# Altium PCB arduino.PcbDoc
Units mil, origin at the board's own origin, x right, y up, seen from the top; angles counter-clockwise.
Board outline 3149.61 x 3149.61 mil, 2 copper layers (Top Layer, Bottom Layer); 27 components, 42 nets, 155 pads, 33 vias.
Unrouted connection lines stored in the file: 2.
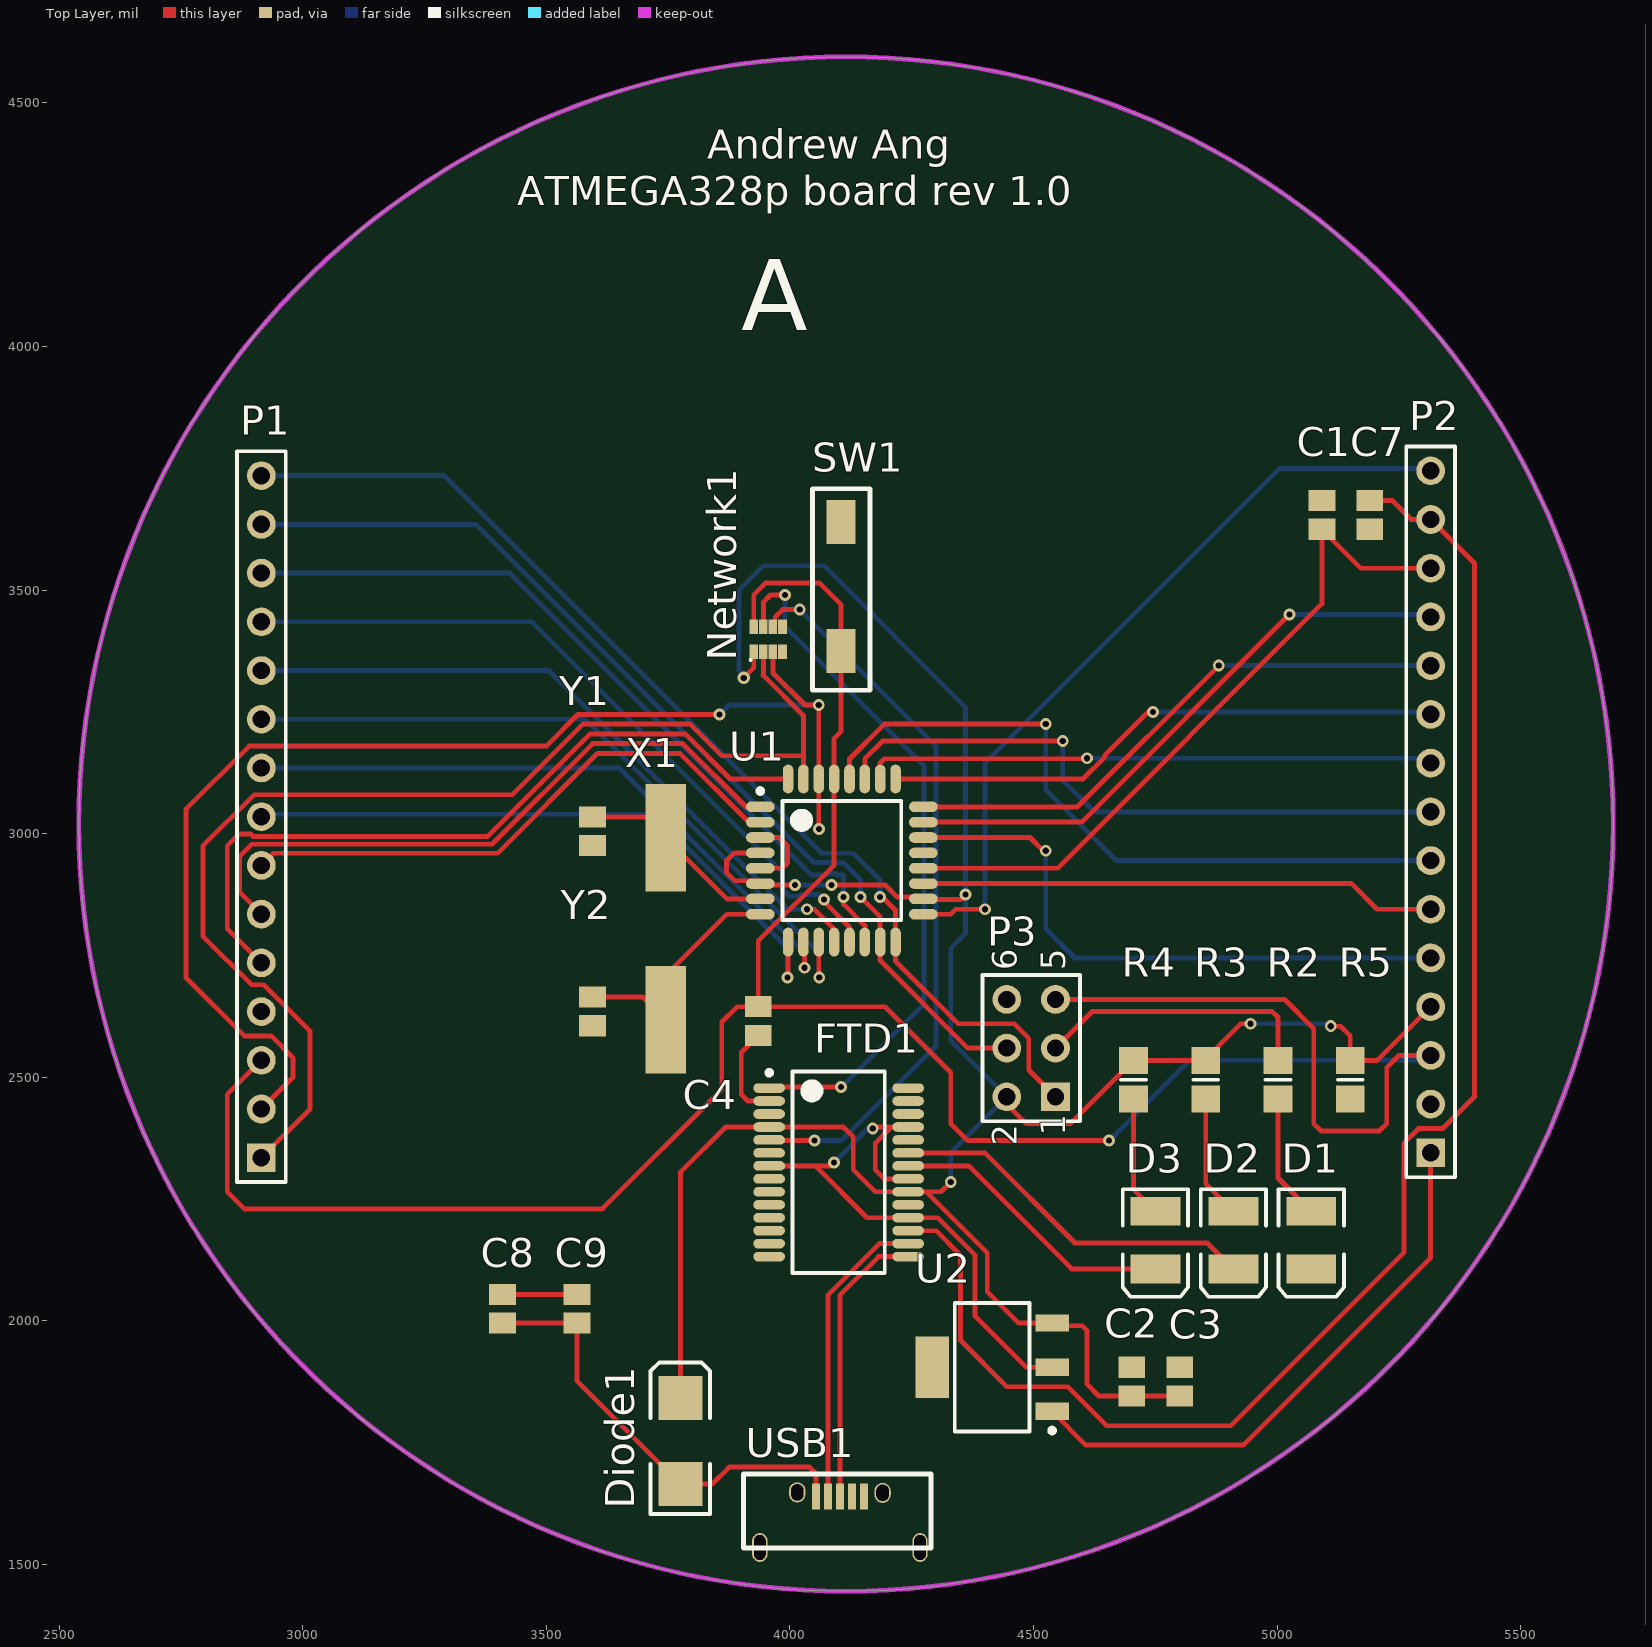
[diagram p0: Top Layer view]
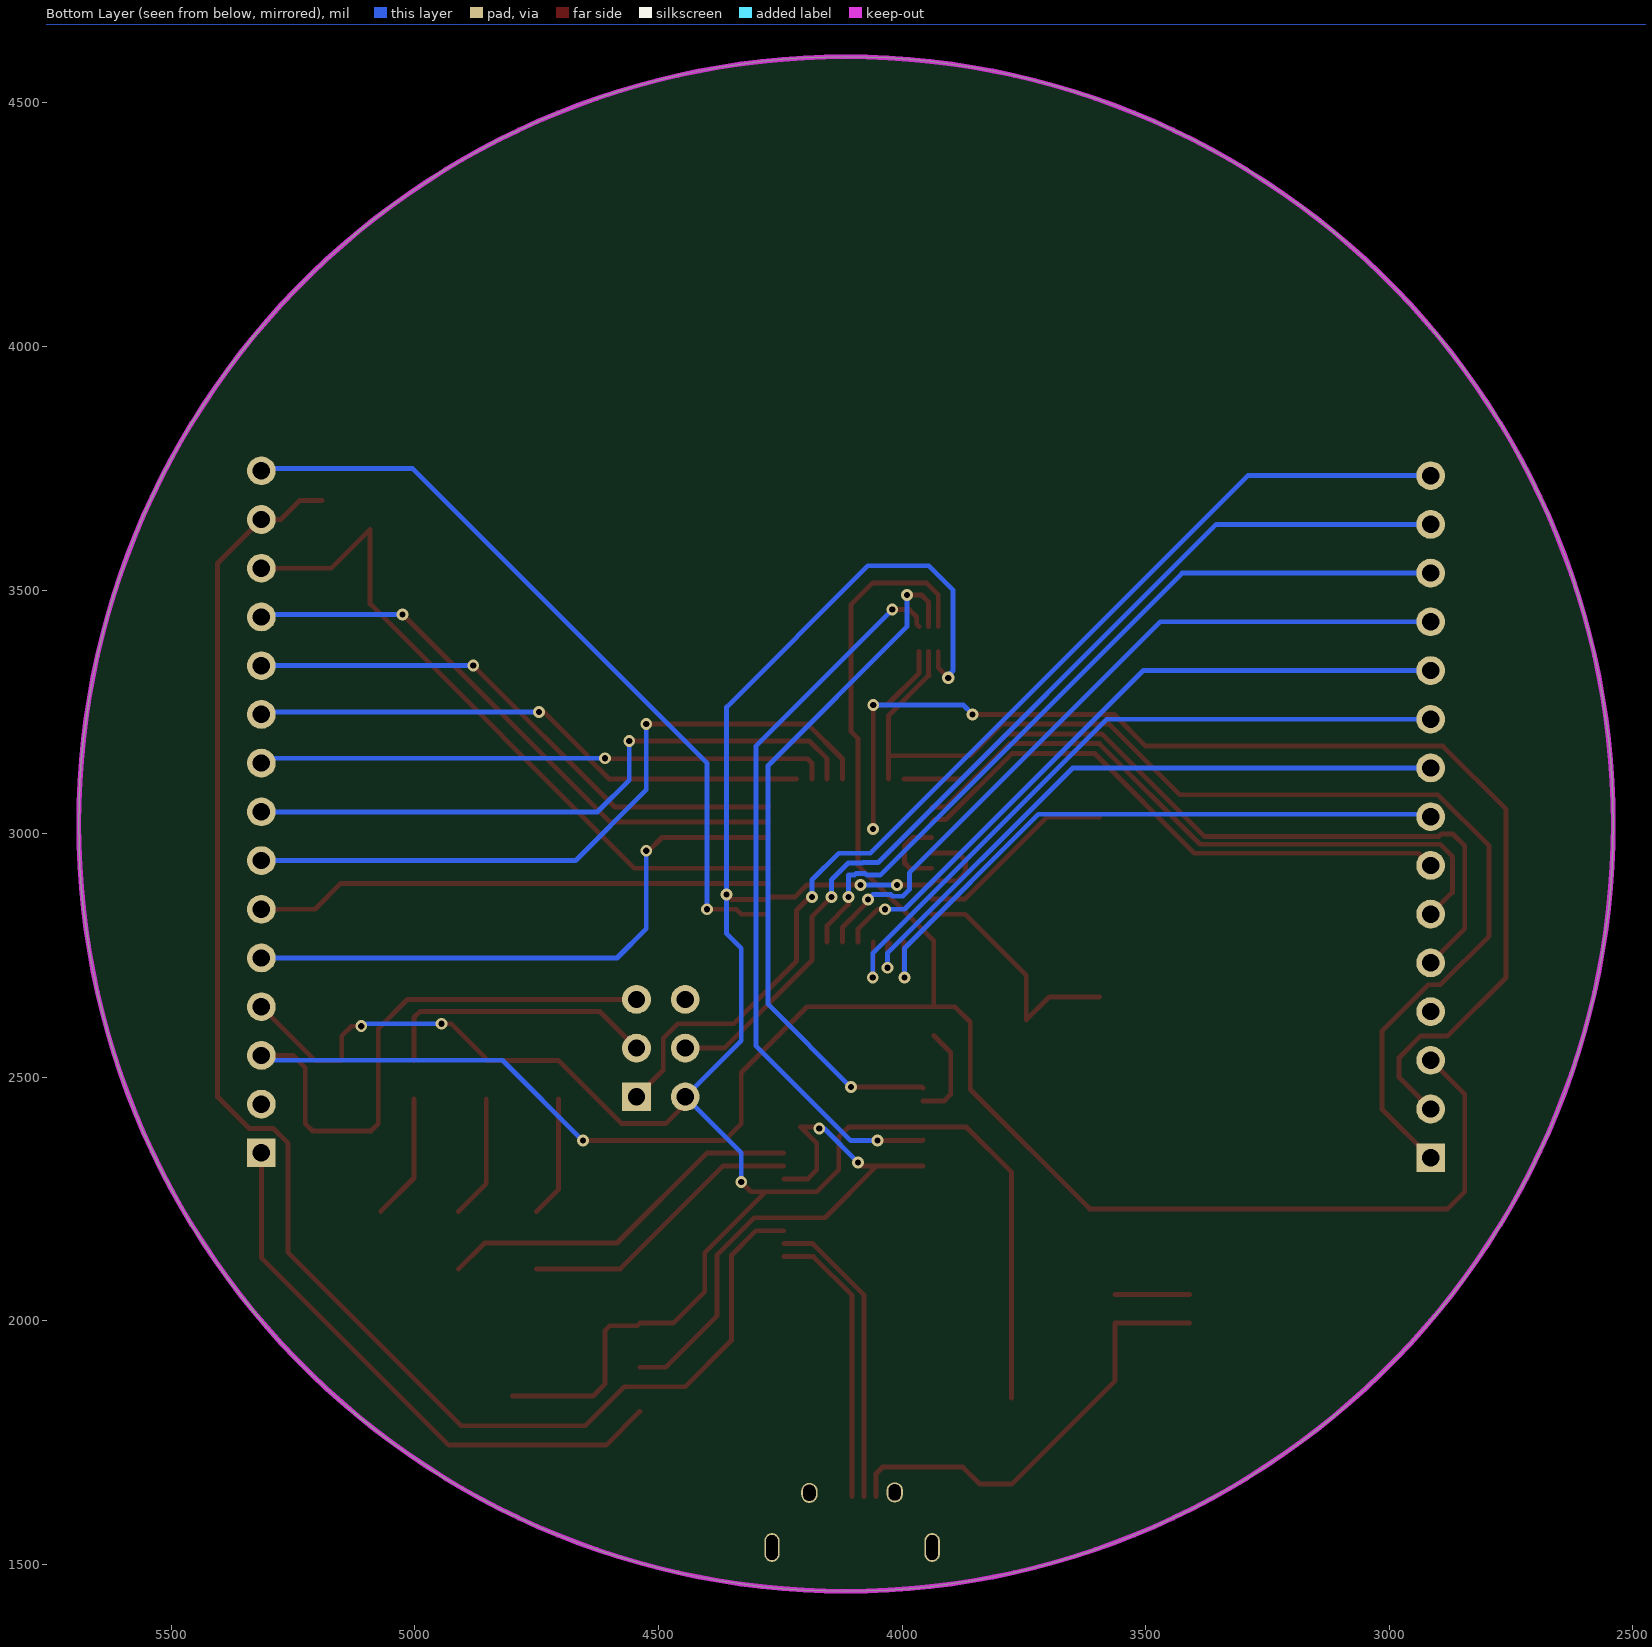
[diagram p1: Bottom Layer view, seen from below]

## Layer stack, top to bottom
Top Solder: solder mask 0.4, Solder Resist, Dk 3.5
Top Layer: signal copper 1.4
Dielectric 1: dielectric 12.6, FR-4, Dk 4.8
Bottom Layer: signal copper 1.4
Bottom Solder: solder mask 0.4, Solder Resist, Dk 3.5

## Board outline
2540.2,3020 ccw(c4115,3020) 4115,1445.2 ccw(c4115,3020) 5689.8,3020 ccw(c4115,3020) 4115,4594.8 ccw(c4115,3020)

## Design rules (kind name [scope] priority, off if disabled: settings)
Clearance [All] p1: gap=6
PolygonConnect [All] p1: connectstyle=Relief reliefconductorwidth=10 reliefentries=4 polygonreliefangle="90 Angle" airgapwidth=10
RoutingVias [All] p1: holewidth=28 width=50 viastyle="Through Hole" minholewidth=28 minwidth=50 maxholewidth=28 maxwidth=50
SolderMaskExpansion [All] p1: expansion=4
Width [All] p1: maxlimit=10 minlimit=10 preferedwidth=10
30 further rules are at their usual default settings.

## Components (designator, comment, footprint, x,y, rotation, side; value= is the part's Value field where it differs from the comment)
C1 "Cap" C0805 5091.67,3654.53 r90 top
C2 "Cap" C0805 4701.67,1875.47 r270 top
C3 "Cap" C0805 4800,1875.47 r270 top
C4 "Cap" C0805 3935,2615.47 r270 top
C7 "Cap" C0805 5190,3654.53 r90 top
C8 "Cap2" C0805 3410,2025 r90 top
C9 "Cap" C0805 3562.5,2025 r90 top
D1 "LED3" 3.5X2.8X1.9 5070,2165.94 r270 top
D2 "LED3" 3.5X2.8X1.9 4910,2165.94 r270 top
D3 "LED3" 3.5X2.8X1.9 4750,2165.94 r270 top
Diode1 "D Schottky" SMB 3775,1753.58 r90 top
FTD1 "FTD232RL" SOP68P780X200-28N 4100,2305 r0 top
Network1 "1k x4 resistor network" "4x resistor network" 3955.16,3399.41 r90 top
P1 "Header 15" HDR1X15 2915,2335 r90 top
P2 "Header 15" HDR1X15 5315,2345 r90 top
P3 "Header 3X2" HDR2X3 4545,2460 r90 top
R2 "Res1" 6-0805_M 5001.67,2495 r90 top
R3 "Res1" 6-0805_M 4853.33,2495 r90 top
R4 "Res1" 6-0805_M 4705,2495 r90 top
R5 "Res1" 6-0805_M 5150,2495 r90 top
SW1 "SW-PB" SPST 4105,3589.92 r270 top
U1 "ATMEGA328P-AU" TQFP80P900X900X120-32N 4106.42,2945 r0 top
U2 "UA78M05CDCYR" SOT230P700X180-4N 4415,1905 r180 top
USB1 "USB1" "micro usb" 4106.5,1568.46 r0 top
X1 "XTAL" ABLS-16.000MHZ-B4-T 3745,2795 r90 top
Y1 "Cap" C0805 3595,3005 r90 top
Y2 "Cap" C0805 3595,2635.47 r90 top

## Footprints (in the part's own frame and the unit in brackets; to place one, negate y for a bottom-side part, rotate by r counter-clockwise, add the part's x,y. Pads: shape width x height; smd on the part's side, far side on the other; paste and mask are expansions set on the pad)
3.5X2.8X1.9 [mm] "SM LED; 2 C-Bend Leads; Body 3.5 x 2.8 x 1.9 mm, inc leads (LxWxH typ)"
  rect 1.5x2.6 smd: 1(-1.5,0) 2(1.5,0)
  silkscreen extent -2.65,-1.7 2.95,1.7
"4x resistor network" [mm] "Chip Array, ConvexE, 8-Leads, Pitch 0.50mm,  Body 2.00x1.00mm,  IPC Medium Density"
  rect 0.75x0.45 smd: 1(-0.65,0.75) 2(-0.65,0.25) 3(-0.65,-0.25) 4(-0.65,-0.75) 5(0.65,-0.75) 6(0.65,-0.25) 7(0.65,0.25) 8(0.65,0.75)
  silkscreen extent -1.14,0.86 -1.04,0.96, body extent -0.55,-1.05 0.55,1.05, height 0.46
6-0805_M [mm] "Chip Resistor, Body 2.0x1.2mm, IPC Low Density"
  rect 1.4x1.5 smd: 1(-1,0) 2(1,0)
  silkscreen extent 0,-0.65 0,0.65, body extent -1.07,-0.7 1.07,0.7, height 0.7
ABLS-16.000MHZ-B4-T [mm]
  rect 5.6x2.1 smd: 1(5,0) 2(-4.5,0)
  body extent -5.85,-2.35 6.85,2.35, height 4.06
C0805 [mm] "Chip Capacitor, Body 2.0x1.3mm, IPC High Density"
  rect 1.1x1.4 smd: 1(-0.75,0) 2(0.75,0)
  body extent -1.1,-0.72 1.1,0.72, height 1.4
HDR1X15 [mm] "Connector; Header; 15 Position"
  rect 1.5x1.5 hole 0.9: 1(0,0)
  round 1.5 hole 0.9: 2(2.54,0) 3(5.08,0) 4(7.62,0) 5(10.16,0) 6(12.7,0) 7(15.24,0) 8(17.78,0) 9(20.32,0) 10(22.86,0) 11(25.4,0) 12(27.94,0) 13(30.48,0) 14(33.02,0) 15(35.56,0)
  silkscreen extent -1.27,-1.27 36.83,1.27
HDR2X3 [mm] "Connector; Header; 3x2 Position"
  rect 1.5x1.5 hole 0.9: 1(0,0)
  round 1.5 hole 0.9: 2(0,2.54) 3(2.54,0) 4(2.54,2.54) 5(5.08,0) 6(5.08,2.54)
  silkscreen extent -1.27,-1.27 6.35,3.81, body extent -1.19,-1.23 6.43,3.81, height 8.5
"micro usb" [mm]
  rect 0.4x1.35 smd: 1(-1.35,1.8) 2(-0.725,1.8) 3(-0.1,1.8) 4(0.525,1.8) 5(1.15,1.8)
  oval 0.85x1.05 hole 0.65 slot 0.85 at 90 deg: 6(-2.325,2.025) 7(2.125,2)
  oval 0.8x1.5 hole 0.6 slot 1.3 at 90 deg: 8(-4.275,-0.85) 9(4.075,-0.85)
  silkscreen extent -5.13,-0.87 4.65,2.98, body extent -4.37,-3.54 4.28,2.35, height 2.81
SMB [mm] "DO-214-AA/SMB; 2 C-Bend Leads; Body 5.3 x 3.6 mm, inc. leads (LxW)"
  rect 2.3x2.3 smd: 1(-2.25,0) 2(2.25,0)
  silkscreen extent -3.8,-1.55 4.1,1.55
SOP68P780X200-28N [mm] "SOP, 28-Leads, Body 10.20x5.30mm, Pitch 0.68mm, IPC Medium Density"
  oval 1.65x0.5 smd: 1(-3.625,4.394) 2(-3.625,3.718) 3(-3.625,3.042) 4(-3.625,2.366) 5(-3.625,1.69) 6(-3.625,1.014) 7(-3.625,0.338) 8(-3.625,-0.338) 9(-3.625,-1.014) 10(-3.625,-1.69) 11(-3.625,-2.366) 12(-3.625,-3.042) 13(-3.625,-3.718) 14(-3.625,-4.394) 15(3.625,-4.394) 16(3.625,-3.718) 17(3.625,-3.042) 18(3.625,-2.366) 19(3.625,-1.69) 20(3.625,-1.014) 21(3.625,-0.338) 22(3.625,0.338) 23(3.625,1.014) 24(3.625,1.69) 25(3.625,2.366) 26(3.625,3.042) 27(3.625,3.718) 28(3.625,4.394)
  silkscreen extent -3.75,-5.25 2.4,5.32, body extent -3.88,-5.16 3.88,5.17, height 2.16
SOT230P700X180-4N [mm] "SOT223, 4-Leads, Body 6.50x7.00mm (avg), Pitch 2.30mm, IPC Medium Density"
  rect 1.75x0.9 smd: 1(-3.125,2.3) 2(-3.125,0) 3(-3.125,-2.3)
  rect 1.75x3.2 smd: 2(3.125,0)
  silkscreen extent -3.25,-3.35 1.95,3.42, body extent -3.39,-3.35 3.9,3.35, height 1.7
SPST [mm]
  rect 2.3x1.5 smd: 1(-1.27,0) 2(5.459,0)
  silkscreen extent -3,-1.5 7.5,1.5, body extent -2,-1.75 6,1.75, height 4.3
TQFP80P900X900X120-32N [mm] "TQFP, 32-Leads, Body 7.00x7.00mm, Pitch 0.80mm, IPC Medium Density"
  oval 1.5x0.55 smd: 1(-4.25,2.8) 2(-4.25,2) 3(-4.25,1.2) 4(-4.25,0.4) 5(-4.25,-0.4) 6(-4.25,-1.2) 7(-4.25,-2) 8(-4.25,-2.8) 17(4.25,-2.8) 18(4.25,-2) 19(4.25,-1.2) 20(4.25,-0.4) 21(4.25,0.4) 22(4.25,1.2) 23(4.25,2) 24(4.25,2.8)
  oval 0.55x1.5 smd: 9(-2.8,-4.25) 10(-2,-4.25) 11(-1.2,-4.25) 12(-0.4,-4.25) 13(0.4,-4.25) 14(1.2,-4.25) 15(2,-4.25) 16(2.8,-4.25) 25(2.8,4.25) 26(2,4.25) 27(1.2,4.25) 28(0.4,4.25) 29(-0.4,4.25) 30(-1.2,4.25) 31(-2,4.25) 32(-2.8,4.25)
  silkscreen extent -4.37,-3.1 3.1,3.75, body extent -4.51,-4.57 4.49,4.43, height 1.6

## Part data
C1 C2 C3 C4 C7 C8 C9 Y1 Y2: "Capacitor"
D1 D2 D3: "Typical BLUE SiC LED"
Diode1: "Schottky Diode"
FTD1: "FTDI Chip FT232RL Universal Asynchronous Receiver & Transmitter 3MBd, 28-Pin, SSOP"
P1 P2: "Header, 15-Pin"
P3: "Header, 3-Pin, Dual row"
R2 R3 R4 R5: "Resistor"
SW1: "Switch"
U1: "Atmel ATMEGA328P-AU, 8bit AVR Microcontroller, 20MHz, 1 kB, 32 kB Flash, 32-Pin TQFP"
U2: "n Linear Voltage Regulator IC Positive Fixed 1 Output 5V 500mA SOT-223-4"
USB1: library part Component_1
X1: "Crystal Oscillator"

## Via types
v1: diameter 24.41, hole 12.6, Top Layer to Bottom Layer, 32 vias
v2: diameter 25.67, hole 12.6, Top Layer to Bottom Layer, 1 vias

## Nets (pads, with @x,y where several pads share a name; then routed paths per layer and width w, separated by ;. In a path a pad name is that pad's centre, name@x,y a point inside that pad or via, vN(x,y) a via of type N, cw(c..) or ccw(c..) an arc to the next point about the centre after c; other vN are vias at no path point)
3V3: C7.2 FTD1.17 P2.14 | length 3205.2
  Top Layer w10: FTD1.17 4242.95,2185 4300,2185 4350,2135 4350,1960 4445,1865 4570,1865 4650,1785 4905,1785 5260,2140 5260,2364.61 5290.39,2395 5340,2395 5405,2460 5405,3555 P2.14 5275,3645 5235.94,3684.06 C7.2
5V: C2.2 C3.2 Diode1.2 FTD1.4 FTD1.20 Network1.1 P2.4 P3.2 R3.2 R4.2 R5.2 U1.4 U1.6 U1.18 U2.3 | length 5612.7
  Top Layer w10: Diode1.2 3775,2305 3868.15,2398.15 FTD1.4 4109.67,2398.15 4130,2377.82 4130,2310 4174.92,2265.08 FTD1.20 4279.92,2265.08 ; v2(3905,3320) 3925.63,3340.63 Network1.1 ; U1.4 3885.75,2960.75 3870,2945 3870,2920 3886.57,2903.43 3933.43,2903.43 U1.6 3941.85,2895 v1(4010,2895) ; v1(4085,2895) 4195,2895 4220,2870 4270,2870 U1.18 4275,2865 4350,2865 v1(4360,2875) ; v1(4330,2285) 4310.08,2265.08 4279.92,2265.08 ; P3.2 4445,2445 4485,2405 4575.63,2405 R4.2 R3.2 4853.33,2538.33 4925,2610 v1(4945,2610) ; C3.2 C2.2 4634.06,1845.94 4610,1870 4610,1980 4600,1990 4543.58,1990 U2.3 4469.45,1995.55 4405,2060 4405,2140 4279.92,2265.08 ; v1(5110,2605) 5130,2605 5150,2585 R5.2 5204.37,2534.37 P2.4
  Bottom Layer w10: v2(3905,3320) 3905,3325 3895,3335 3895,3500 3945,3550 4070,3550 4360,3260 v1(4360,2875) 4360,2795 4330,2765 4330,2575 P3.2 4330,2345 v1(4330,2285) ; v1(4010,2895) v1(4085,2895) ; v1(4945,2610) 5105,2610 v1(5110,2605)
A0: P2.12 U1.23 | length 1219.9
  Top Layer w10: U1.23 4598.74,3023.74 v1(5025,3450)
  Bottom Layer w10: v1(5025,3450) 5310,3450 P2.12
A1: P2.11 U1.24 | length 1161.3
  Top Layer w10: U1.24 4590.24,3055.24 v1(4880,3345)
  Bottom Layer w10: v1(4880,3345) P2.11
A2: P2.10 U1.25 | length 1168
  Top Layer w10: U1.25 4601.16,3112.32 4646,3157.16 4646,3161 4735,3250 v1(4745,3250)
  Bottom Layer w10: v1(4745,3250) 5290,3250 5300,3260 P2.10
A3: P2.9 U1.26 | length 1170.9
  Top Layer w10: U1.26 4185.16,3145.16 4194,3154 4609,3154 v1(4610,3155)
  Bottom Layer w10: v1(4610,3155) 5305,3155 P2.9
A4: P2.8 U1.27 | length 1324.7
  Top Layer w10: U1.27 4153.66,3153.66 4190,3190 v1(4560,3190)
  Bottom Layer w10: v1(4560,3190) 4560,3110 4625,3045 P2.8
A5: P2.7 U1.28 | length 1458.6
  Top Layer w10: U1.28 4122.17,3153.41 4193.76,3225 v1(4525,3225)
  Bottom Layer w10: v1(4525,3225) 4525,3090 4670,2945 P2.7
A6: P2.6 U1.19 | length 1063.5
  Top Layer w10: U1.19 4274.19,2898.2 5151.8,2898.2 5205,2845 P2.6
A7: P2.5 U1.22 | length 1237.4
  Top Layer w10: U1.22 4492.76,2992.24 4520,2965 v1(4525,2965)
  Bottom Layer w10: v1(4525,2965) 4525,2805 4585,2745 P2.5
AREF: C1.1 P2.13 U1.20 | length 1452.4
  Top Layer w10: U1.20 4549.25,2929.25 5091.67,3471.67 C1.1 5171.67,3545 P2.13
CBUS0: D2.2 FTD1.23 | length 765.9
  Top Layer w10: FTD1.23 4400.08,2344.92 4585,2160 4856.89,2160 D2.2
CBUS1: D3.2 FTD1.22 | length 594.9
  Top Layer w10: FTD1.22 4366.69,2318.31 4578.11,2106.89 D3.2
D2: P1.5 U1.32 | length 1558
  Top Layer w10: P1.5 2845,2805 2845,2975 2869.47,2999.47 2893.21,2999.47 2898.21,2994.47 3379.47,2994.47 3590,3205 3785,3205 3877.68,3112.32 U1.32
D3: P1.6 U1.1 | length 1355.2
  Top Layer w10: P1.6 2870.47,2879.53 2870.47,2953.44 2895.5,2978.47 3388.47,2978.47 3595,3185 3780,3185 3909.76,3055.24 U1.1
D4: P1.7 U1.2 | length 1177.9
  Top Layer w10: P1.7 2940,2960 3400,2960 3605,3165 3774.11,3165 3909.7,3029.41 3933.43,3029.41 U1.2
D5: P1.8 U1.9 | length 1329.1
  Top Layer w10: v1(3995,2705) 3996.18,2706.18 U1.9
  Bottom Layer w10: P1.8 2920,3040 3720,3040 3995,2765 v1(3995,2705)
D6: P1.9 U1.10 | length 1358.3
  Top Layer w10: U1.10 4025,2775 4030,2770 v1(4030,2725)
  Bottom Layer w10: P1.9 3650,3135 4030,2755 v1(4030,2725)
D7: P1.10 U1.11 | length 1466.8
  Top Layer w10: U1.11 4059.17,2705.83 v1(4060,2705)
  Bottom Layer w10: P1.10 3580,3235 4060,2755 v1(4060,2705)
D8: P1.11 U1.12 | length 1422.1
  Top Layer w10: v1(4035,2845) 4050,2845 4090.67,2804.33 U1.12
  Bottom Layer w10: P1.11 3505,3335 3995,2845 v1(4035,2845)
D9: P1.12 U1.13 | length 1523.2
  Top Layer w10: v1(4070,2865) 4070,2860 4122.17,2807.83 U1.13
  Bottom Layer w10: P1.12 3470,3435 3985,2920 3985,2885 3998.2,2871.8 4019.61,2871.8 4022.82,2875 4060,2875 v1(4070,2865)
D10: P1.13 U1.14 | length 1609.9
  Top Layer w10: v1(4110,2870) 4110,2855 4153.66,2811.34 U1.14
  Bottom Layer w10: P1.13 3425,3535 4045,2915 4072.18,2915 4075.39,2918.2 4094.61,2918.2 4097.82,2915 4110,2915 v1(4110,2870)
D+: FTD1.15 USB1.3 | length 586.3
  Top Layer w10: USB1.3 4102.56,2052.56 4182.01,2132.01 FTD1.15
D-: FTD1.16 USB1.2 | length 622.2
  Top Layer w10: USB1.2 4077.95,2052.95 4183.62,2158.62 FTD1.16
GND: C1.2 C2.1 C3.1 C7.1 C8.2 C9.2 D1.2 FTD1.7 FTD1.18 FTD1.21 FTD1.25 P1.4 P2.2 P3.6 R5.1 SW1.1 U1.3 U1.5 U1.21 U2.2 USB1.5 USB1.6 USB1.7 USB1.8 USB1.9 Y1.1 Y2.1 | length 1509.9
  Top Layer w10: C8.2 C9.2 ; U1.5 3984.25,2929.25 3995,2940 3995,2975 3977.76,2992.24 U1.3 ; FTD1.7 4051.69,2318.31 ; v1(4090,2325) 4083.31,2318.31 4051.69,2318.31 ; v1(4170,2395) 4173.15,2398.15 4208.15,2398.15 4175,2365 4175,2310 4193.31,2291.69 FTD1.21 ; U2.2@4538.03,1905 4485,1905 4380,2010 4380,2135 4303.15,2211.85 FTD1.18 4158.15,2211.85 4051.69,2318.31
  Bottom Layer w10: v1(4090,2325) 4160,2395 v1(4170,2395) v1@4175,2390
"MISO D12": P1.15 P3.1 U1.16 | length 2278.2
  Top Layer w10: v1(4185,2870) 4190,2870 4216.65,2843.35 U1.16 4216.65,2738.35 4345,2610 4460,2610 4490,2580 4490,2515 P3.1
  Bottom Layer w10: P1.15 3290,3735 4065,2960 4130,2960 4185,2905 v1(4185,2870)
"MOSI D11": P1.14 P3.4 U1.15 | length 2048.5
  Top Layer w10: v1(4145,2870) 4185.16,2829.84 U1.15 4185.16,2739.84 4365,2560 P3.4
  Bottom Layer w10: P1.14 3355,3635 4049,2941 4080.3,2941 4081.3,2940 4110,2940 4145,2905 v1(4145,2870)
NetC4_2: C4.2 FTD1.2 | length 198.4
  Top Layer w10: C4.2 3900,2550.94 3900,2465 3913.62,2451.38 FTD1.2
NetD1_1: D1.1 R2.1 | length 258.9
  Top Layer w10: R2.1 5001.67,2293.33 D1.1
NetD2_1: D2.1 R3.1 | length 254.1
  Top Layer w10: R3.1 4853.33,2281.67 D2.1
NetD3_1: D3.1 R4.1 | length 249.3
  Top Layer w10: R4.1 4705,2270 D3.1
RESET: C4.1 Network1.8 P1.3 P2.3 P3.5 SW1.2 U1.29 | length 5581.6
  Top Layer w10: P1.3 2845,2465 2845,2265 2880,2230 3615,2230 3860,2475 3860,2613.6 3891.4,2645 C4.1 ; Network1.8 3925.63,3490.63 3950,3515 4060,3515 4105,3470 SW1.2 4105,3210 4090.67,3195.67 U1.29 4090.67,2935.67 4012.5,2857.5 4011.94,2857.5 3935,2780.56 C4.1 ; P3.5 5015,2660 5075,2600 5075,2405 5090,2390 5210,2390 5225,2405 5225,2520 5250,2545 P2.3 ; v1(4655,2370) 4365,2370 4330,2405 4330,2510 4195,2645 C4.1
  Bottom Layer w10: v1(4655,2370) 4820,2535 5305,2535 P2.3
RX1: Network1.2 P1.1 U1.31 | length 2493.9
  Top Layer w10: P1.1 3015,2435 3015,2595 2920,2690 2895,2690 2795,2790 2795,2975 2900,3080 3430,3080 3575,3225 3795,3225 3860,3160 4027.68,3160 U1.31 4027.68,3242.32 3945,3325 3945.31,3325.31 Network1.2
RX2: FTD1.1 Network1.7 | length 1448.1
  Top Layer w10: Network1.7 3945.31,3475.31 3960,3490 v1(3990,3490) ; FTD1.1 3959.29,2480 v1(4105,2480)
  Bottom Layer w10: v1(3990,3490) 3990,3425 4275,3140 4275,2650 v1(4105,2480)
SCK: P3.3 R2.2 | length 581.5
  Top Layer w10: P3.3 4620,2635 4990,2635 5001.67,2623.33 R2.2
"SCK D13": P2.15 U1.17 | length 1598.2
  Top Layer w10: U1.17 4329.76,2834.76 4340,2845 v1(4400,2845)
  Bottom Layer w10: v1(4400,2845) 4400,3145 5005,3750 5310,3750 P2.15
TX1: Network1.3 P1.2 U1.30 | length 2573.3
  Top Layer w10: P1.2 2980,2500 2980,2540 2935,2585 2880,2585 2760,2705 2760,3050 2890,3180 3500,3180 3565,3245 v1(3855,3245) ; Network1.3 3965,3330 4030.83,3264.17 v1(4059.17,3264.17) U1.30 4059.17,3009.67 v1(4059.42,3009.42)
  Bottom Layer w10: v1(3855,3245) 3874.17,3264.17 v1(4059.17,3264.17)
TX2: FTD1.5 Network1.6 | length 1513.4
  Top Layer w10: FTD1.5 3958.82,2370 v1(4050,2370) ; Network1.6 3969.83,3429.83 3969.83,3444.83 3985,3460 v1(4020,3460)
  Bottom Layer w10: v1(4020,3460) 4300,3180 4300,2565 4105,2370 v1(4050,2370)
VIN: P2.1 U2.1 | length 1180.2
  Top Layer w10: U2.1 4607.48,1745 4930,1745 5315,2130 P2.1
VUSB: C8.1 C9.1 Diode1.1 USB1.1 | length 916.7
  Top Layer w10: C8.1 C9.1 3562.5,1877.5 Diode1.1 3840,1665 3875,1700 4040,1700 4053.35,1686.65 USB1.1
XTAL1: U1.7 X1.1 Y1.2 | length 413.8
  Top Layer w10: Y1.2 3702.32,3034.53 X1.1 3870.59,2866.26 U1.7
XTAL2: U1.8 X1.2 Y2.2 | length 507.2
  Top Layer w10: Y2.2 3697.83,2665 X1.2 3745,2709.53 3870.24,2834.76 U1.8
pads on no net: FTD1.3 FTD1.6 FTD1.8 FTD1.9 FTD1.10 FTD1.11 FTD1.12 FTD1.13 FTD1.14 FTD1.19 FTD1.24 FTD1.26 FTD1.27 FTD1.28 Network1.4 Network1.5 USB1.4

## Polygon pours and split planes (outlines as drawn)
GND on Top Layer "GND plane" (solid, remove dead copper, shelved, pour order 30): 2340,4695 5755,4695 5755,1070 5745,1060 2335,1060
GND on Bottom Layer "GND plane bottom layer" (solid, remove dead copper, shelved, pour order 32): 2245,4660 6005,4660 6000,4655 6000,1185 2245,1185 2225,1205

## Keep-outs
Keep-Out Layer:
  circle w10: c4115,3020 r1574.8

## Silkscreen, mask and mechanical layers (free items; w line width, h text height)
Top Overlay:
  text "Andrew Ang" at 3830,4385 h60
  text "ATMEGA328p board rev 1.0" at 3440,4290 h60
  text "A" at 3900,3985 h250

## Text inside footprints (layer, text, board x,y; h text height)
P3: Top Overlay "6" at 4465,2720 h50 r90; Top Overlay "5" at 4565,2720 h50 r90; Top Overlay "2" at 4465,2360 h50 r90; Top Overlay "1" at 4565,2380 h50 r90